# Altium PCB RF315Mhz.PcbDoc (part 2 of 5)
Units mil, origin at the board's own origin, x right, y up, seen from the top; angles counter-clockwise.
Board outline 4094.49 x 3779.53 mil, 2 copper layers (Top Layer, Bottom Layer); 180 components, 20 nets, 660 pads, 48 vias.
Unrouted connection lines stored in the file: 100.
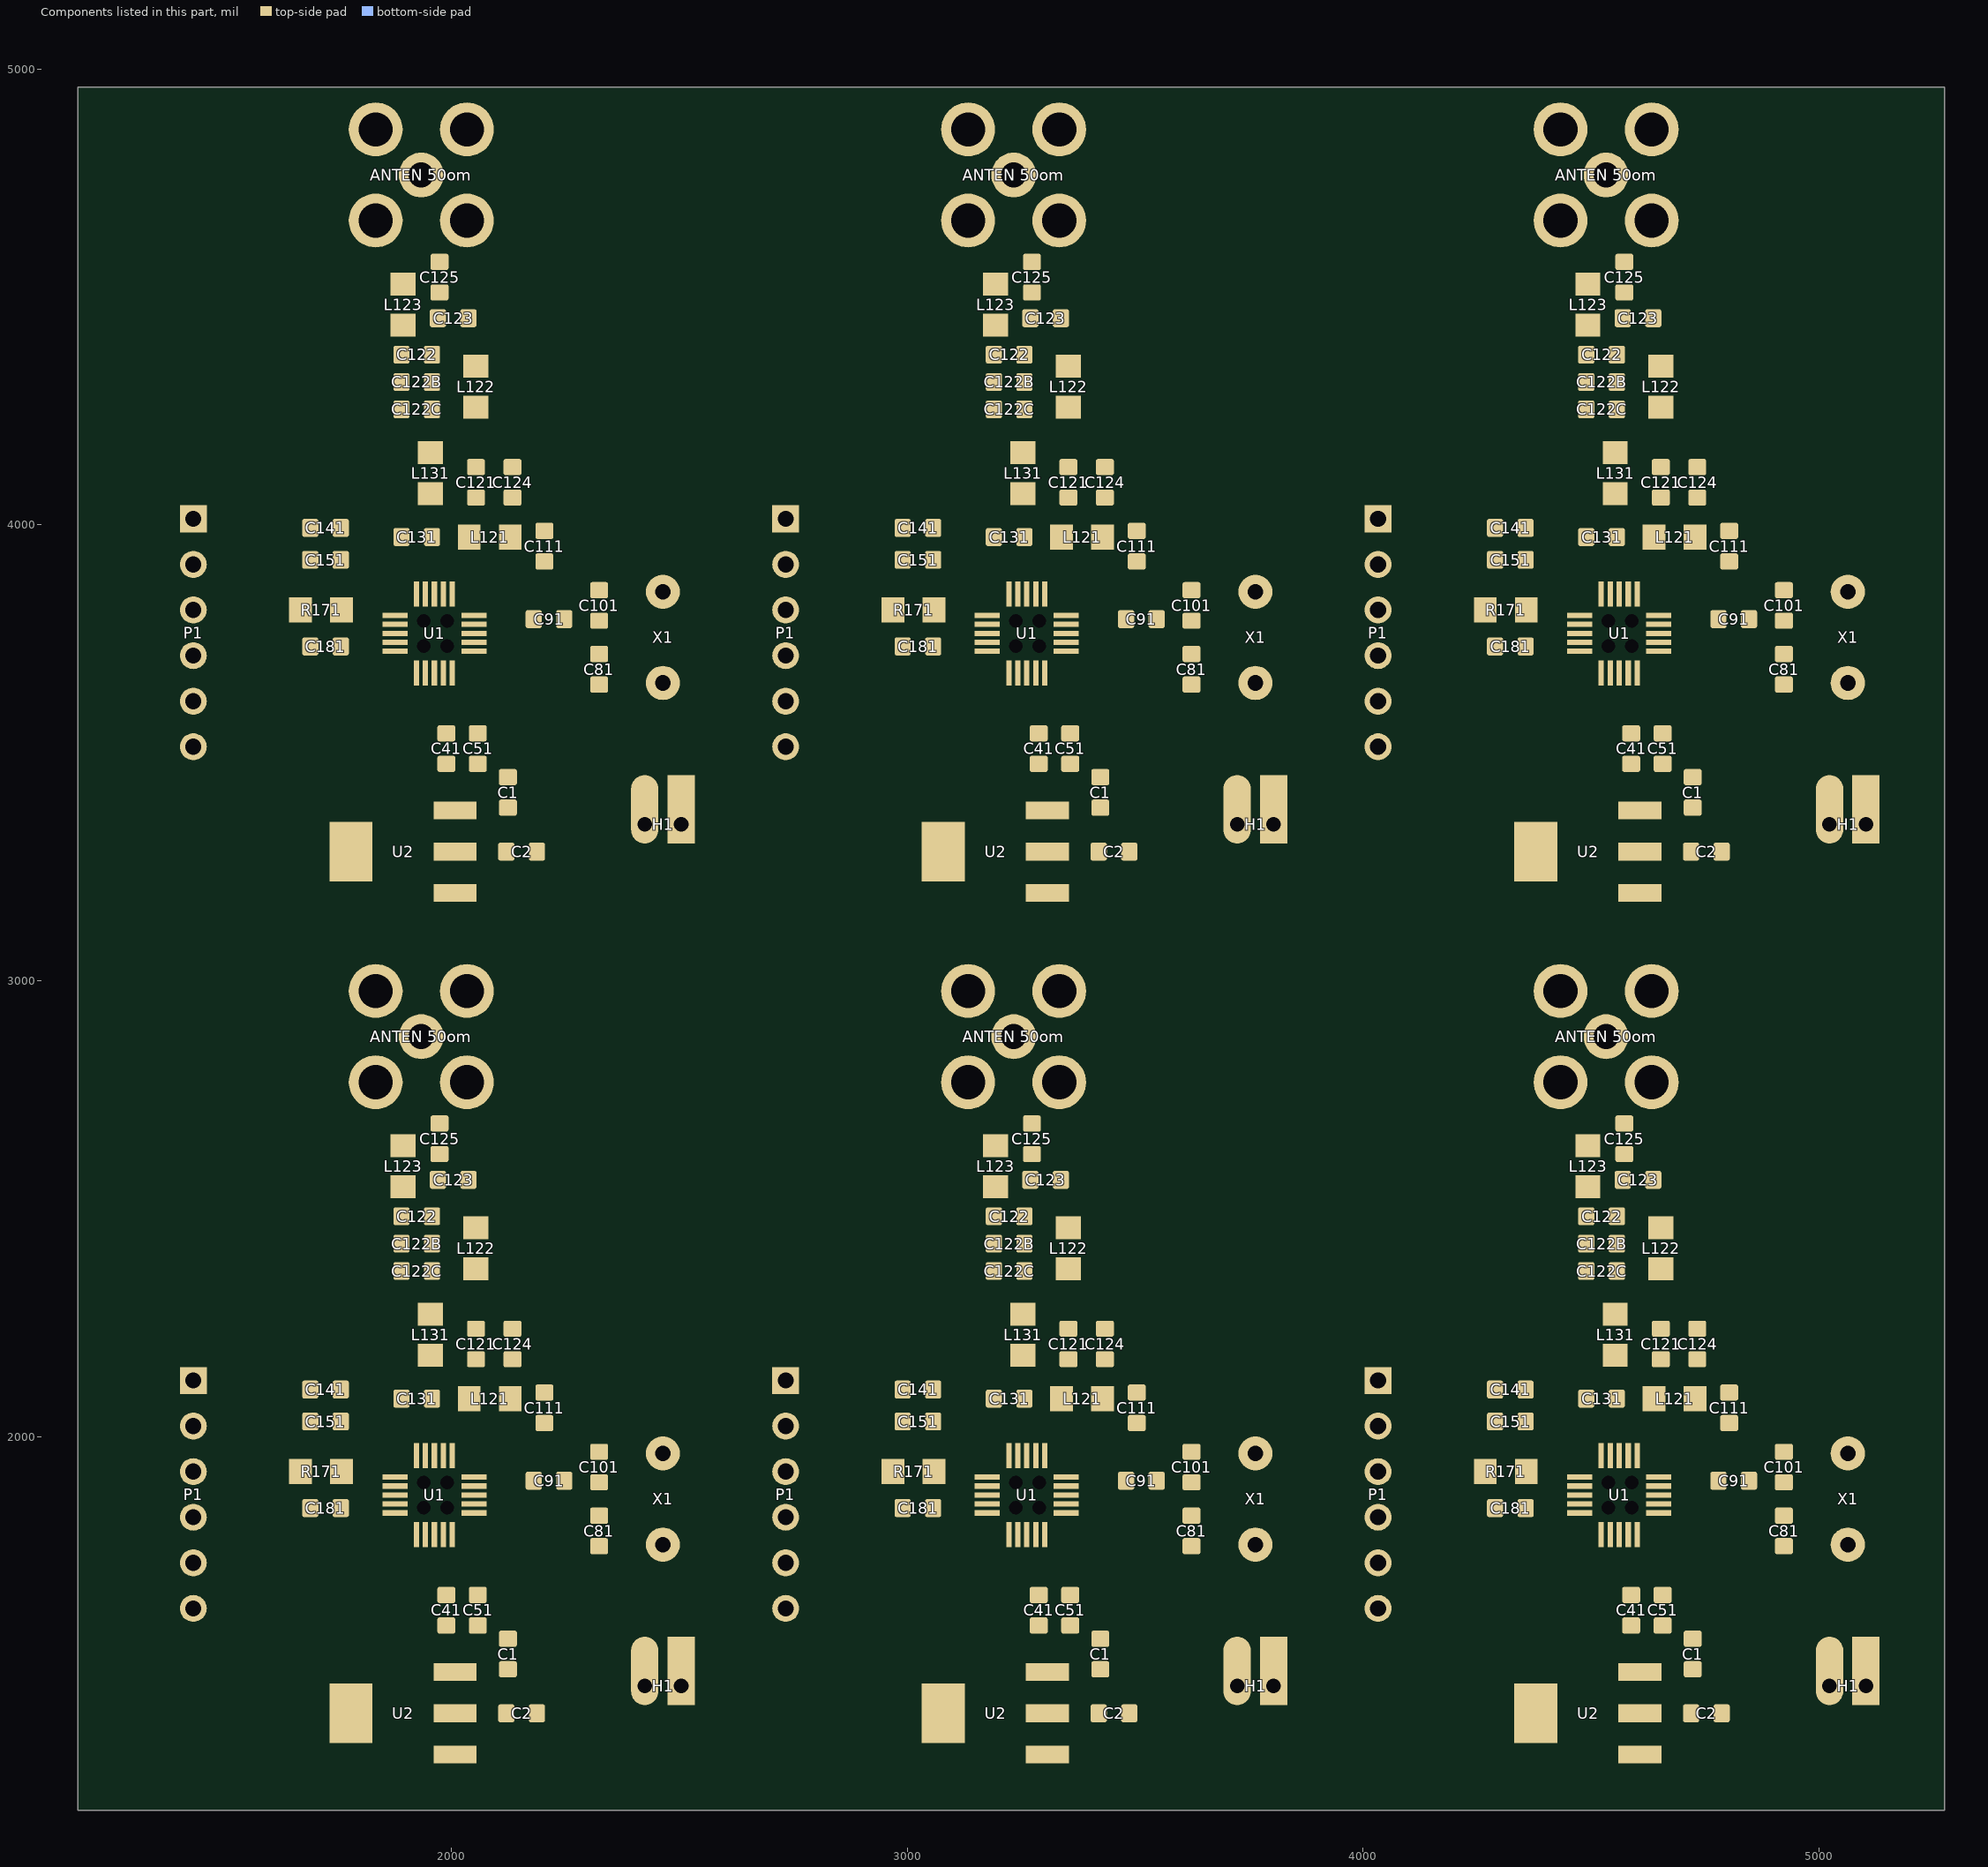
[diagram p2: the components of this part, seen from the top]

## Via types
v1: diameter 50, hole 28, Top Layer to Bottom Layer, 48 vias

## Nets (pads, with @x,y where several pads share a name; then routed paths per layer and width w, separated by ;. In a path a pad name is that pad's centre, name@x,y a point inside that pad or via, vN(x,y) a via of type N, cw(c..) or ccw(c..) an arc to the next point about the centre after c; other vN are vias at no path point) (continued)
copper on no net: (continued)
  Top Layer w1: 2319.57,2807.78 2322.57,2807.78 ; 2319.57,2808.78 2322.57,2808.78 ; 2319.57,2809.78 2322.57,2809.78 ; 2319.57,2810.78 2322.57,2810.78 ; 2319.57,2811.78 2322.57,2811.78 ; 2319.57,2812.78 2322.57,2812.78 ; 2319.57,2813.78 2322.57,2813.78 ; 2319.57,2814.78 2322.57,2814.78 ; 2319.57,2815.78 2322.57,2815.78 ; 2319.57,2816.78 2322.57,2816.78 ; 2319.57,2817.78 2322.57,2817.78 ; 2319.57,2818.78 2322.57,2818.78 ; 2319.57,2819.78 2322.57,2819.78 ; 2319.57,2820.78 2322.57,2820.78 ; 2319.57,2821.78 2322.57,2821.78 ; 2319.57,2822.78 2322.57,2822.78 ; 2319.57,2823.78 2322.57,2823.78 ; 2319.57,2824.78 2322.57,2824.78 ; 2319.57,2825.78 2322.57,2825.78 ; 2319.57,2826.78 2322.57,2826.78 ; 2319.57,2827.78 2322.57,2827.78 ; 2319.57,2828.78 2322.57,2828.78 ; 2319.57,2829.78 2322.57,2829.78 ; 2319.57,2830.78 2322.57,2830.78 ; 2319.57,2831.78 2322.57,2831.78 ; 2319.57,2832.78 2322.57,2832.78 ; 2319.57,2833.78 2322.57,2833.78 ; 2319.57,2834.78 2322.57,2834.78 ; 2319.57,2835.78 2322.57,2835.78 ; 2319.57,2836.78 2322.57,2836.78 ; 2319.57,2837.78 2322.57,2837.78 ; 2319.57,2838.78 2322.57,2838.78 ; 2319.57,2839.78 2322.57,2839.78 ; 2319.57,2840.78 2322.57,2840.78 ; 2319.57,2841.78 2322.57,2841.78 ; 2319.57,2842.78 2322.57,2842.78 ; 2319.57,2843.78 2322.57,2843.78 ; 2319.57,2844.78 2322.57,2844.78 ; 2319.57,2845.78 2322.57,2845.78 ; 2319.57,2846.78 2322.57,2846.78 ; 2319.57,2847.78 2322.57,2847.78 ; 2319.57,2848.78 2322.57,2848.78 ; 2319.57,2849.78 2322.57,2849.78 ; 2319.57,2850.78 2322.57,2850.78 ; 2319.57,2851.78 2322.57,2851.78 ; 2319.57,2852.78 2322.57,2852.78 ; 2319.57,2853.78 2322.57,2853.78 ; 2319.57,2854.78 2322.57,2854.78 ; 2319.57,2855.78 2322.57,2855.78 ; 2319.57,2856.78 2322.57,2856.78 ; 2319.57,2857.78 2322.57,2857.78 ; 2319.57,2858.78 2322.57,2858.78 ; 2319.57,2859.78 2322.57,2859.78 ; 2319.57,2860.78 2322.57,2860.78 ; 2319.57,2861.78 2322.57,2861.78 ; 2319.57,2862.78 2322.57,2862.78 ; 2319.57,2863.78 2322.57,2863.78 ; 2319.57,2864.78 2322.57,2864.78 ; 2319.57,2865.78 2322.57,2865.78 ; 2319.57,2866.78 2322.57,2866.78 ; 2319.57,2867.78 2322.57,2867.78 ; 2319.57,2868.78 2322.57,2868.78 ; 2319.57,2869.78 2322.57,2869.78 ; 2319.57,2870.78 2322.57,2870.78 ; 2319.57,2871.78 2322.57,2871.78 ; 2319.57,2872.78 2322.57,2872.78 ; 2319.57,2873.78 2322.57,2873.78 ; 2319.57,2874.78 2322.57,2874.78 ; 2319.57,2875.78 2322.57,2875.78 ; 2319.57,2876.78 2322.57,2876.78 ; 2319.57,2877.78 2322.57,2877.78 ; 2319.57,2878.78 2322.57,2878.78 ; 2319.57,2879.78 2322.57,2879.78 ; 2319.57,2880.78 2322.57,2880.78 ; 2319.57,2881.78 2322.57,2881.78 ; 2319.57,2882.78 2322.57,2882.78 ; 2319.57,2883.78 2322.57,2883.78 ; 2319.57,2884.78 2322.57,2884.78 ; 2319.57,2885.78 2322.57,2885.78 ; 2319.57,2886.78 2322.57,2886.78 ; 2319.57,2887.78 2322.57,2887.78 ; 2319.57,2888.78 2322.57,2888.78 ; 2319.57,2889.78 2322.57,2889.78 ; 2319.57,2890.78 2322.57,2890.78 ; 2319.57,2891.78 2322.57,2891.78 ; 2319.57,2892.78 2322.57,2892.78 ; 2319.57,2893.78 2322.57,2893.78 ; 2319.57,2894.78 2322.57,2894.78 ; 2319.57,2895.78 2322.57,2895.78 ; 2319.57,2896.78 2322.57,2896.78 ; 2319.57,2897.78 2322.57,2897.78 ; 2319.57,2898.78 2322.57,2898.78 ; 2319.57,2899.78 2322.57,2899.78 ; 2319.57,2900.78 2322.57,2900.78 ; 2319.57,2901.78 2322.57,2901.78 ; 2319.57,2902.78 2322.57,2902.78 ; 2319.57,2903.78 2322.57,2903.78 ; 2319.57,2904.78 2322.57,2904.78 ; 2319.57,2905.78 2322.57,2905.78 ; 2319.57,2906.78 2322.57,2906.78 ; 2319.57,2907.78 2322.57,2907.78 ; 2319.57,2908.78 2322.57,2908.78 ; 2319.57,2909.78 2322.57,2909.78 ; 2319.57,2910.78 2322.57,2910.78 ; 2319.57,2911.78 2322.57,2911.78 ; 2319.57,2912.78 2322.57,2912.78 ; 2319.57,2913.78 2322.57,2913.78 ; 2319.57,2914.78 2322.57,2914.78 ; 2319.57,2915.78 2322.57,2915.78 ; 2319.57,2916.78 2322.57,2916.78 ; 2319.57,2917.78 2322.57,2917.78 ; 2319.57,2918.78 2322.57,2918.78 ; 2319.57,2919.78 2322.57,2919.78 ; 2319.57,2920.78 2322.57,2920.78 ; 2319.57,2921.78 2322.57,2921.78 ; 2319.57,2922.78 2322.57,2922.78 ; 2319.57,2923.78 2322.57,2923.78 ; 2319.57,2924.78 2322.57,2924.78 ; 2319.57,2925.78 2322.57,2925.78 ; 2319.57,2926.78 2322.57,2926.78 ; 2319.57,2927.78 2322.57,2927.78 ; 2319.57,2928.78 2322.57,2928.78 ; 2319.57,2929.78 2322.57,2929.78 ; 2319.57,2930.78 2322.57,2930.78 ; 2319.57,2931.78 2322.57,2931.78 ; 2319.57,2932.78 2322.57,2932.78 ; 2319.57,2933.78 2322.57,2933.78 ; 2319.57,2934.78 2322.57,2934.78 ; 2319.57,2935.78 2322.57,2935.78 ; 2319.57,2936.78 2322.57,2936.78 ; 2319.57,2937.78 2322.57,2937.78 ; 2319.57,2938.78 2322.57,2938.78 ; 2319.57,2939.78 2322.57,2939.78 ; 2319.57,2940.78 2322.57,2940.78 ; 2319.57,2941.78 2322.57,2941.78 ; 2319.57,2942.78 2322.57,2942.78 ; 2319.57,2943.78 2322.57,2943.78 ; 2319.57,2944.78 2322.57,2944.78 ; 2319.57,2945.78 2322.57,2945.78 ; 2319.57,2946.78 2322.57,2946.78 ; 2319.57,2947.78 2322.57,2947.78 ; 2319.57,2948.78 2322.57,2948.78 ; 2319.57,2949.78 2322.57,2949.78 ; 2319.57,2950.78 2322.57,2950.78 ; 2319.57,2951.78 2322.57,2951.78 ; 2319.57,2952.78 2322.57,2952.78 ; 2319.57,2953.78 2323.57,2953.78 ; 2319.57,4697.54 2322.57,4697.54 ; 2319.57,4698.54 2322.57,4698.54 ; 2319.57,4699.54 2322.57,4699.54 ; 2319.57,4700.54 2322.57,4700.54 ; 2319.57,4701.54 2322.57,4701.54 ; 2319.57,4702.54 2322.57,4702.54 ; 2319.57,4703.54 2322.57,4703.54 ; 2319.57,4704.54 2322.57,4704.54 ; 2319.57,4705.54 2322.57,4705.54 ; 2319.57,4706.54 2322.57,4706.54 ; 2319.57,4707.54 2322.57,4707.54 ; 2319.57,4708.54 2322.57,4708.54 ; 2319.57,4709.54 2322.57,4709.54 ; 2319.57,4710.54 2322.57,4710.54 ; 2319.57,4711.54 2322.57,4711.54 ; 2319.57,4712.54 2322.57,4712.54 ; 2319.57,4713.54 2322.57,4713.54 ; 2319.57,4714.54 2322.57,4714.54 ; 2319.57,4715.54 2322.57,4715.54 ; 2319.57,4716.54 2322.57,4716.54 ; 2319.57,4717.54 2322.57,4717.54 ; 2319.57,4718.54 2322.57,4718.54 ; 2319.57,4719.54 2322.57,4719.54 ; 2319.57,4720.54 2322.57,4720.54 ; 2319.57,4721.54 2322.57,4721.54 ; 2319.57,4722.54 2322.57,4722.54 ; 2319.57,4723.54 2322.57,4723.54 ; 2319.57,4724.54 2322.57,4724.54 ; 2319.57,4725.54 2322.57,4725.54 ; 2319.57,4726.54 2322.57,4726.54 ; 2319.57,4727.54 2322.57,4727.54 ; 2319.57,4728.54 2322.57,4728.54 ; 2319.57,4729.54 2322.57,4729.54 ; 2319.57,4730.54 2322.57,4730.54 ; 2319.57,4731.54 2322.57,4731.54 ; 2319.57,4732.54 2322.57,4732.54 ; 2319.57,4733.54 2322.57,4733.54 ; 2319.57,4734.54 2322.57,4734.54 ; 2319.57,4735.54 2322.57,4735.54 ; 2319.57,4736.54 2322.57,4736.54 ; 2319.57,4737.54 2322.57,4737.54 ; 2319.57,4738.54 2322.57,4738.54 ; 2319.57,4739.54 2322.57,4739.54 ; 2319.57,4740.54 2322.57,4740.54 ; 2319.57,4741.54 2322.57,4741.54 ; 2319.57,4742.54 2322.57,4742.54 ; 2319.57,4743.54 2322.57,4743.54 ; 2319.57,4744.54 2322.57,4744.54 ; 2319.57,4745.54 2322.57,4745.54 ; 2319.57,4746.54 2322.57,4746.54 ; 2319.57,4747.54 2322.57,4747.54 ; 2319.57,4748.54 2322.57,4748.54 ; 2319.57,4749.54 2322.57,4749.54 ; 2319.57,4750.54 2322.57,4750.54 ; 2319.57,4751.54 2322.57,4751.54 ; 2319.57,4752.54 2322.57,4752.54 ; 2319.57,4753.54 2322.57,4753.54 ; 2319.57,4754.54 2322.57,4754.54 ; 2319.57,4755.54 2322.57,4755.54 ; 2319.57,4756.54 2322.57,4756.54 ; 2319.57,4757.54 2322.57,4757.54 ; 2319.57,4758.54 2322.57,4758.54 ; 2319.57,4759.54 2322.57,4759.54 ; 2319.57,4760.54 2322.57,4760.54 ; 2319.57,4761.54 2322.57,4761.54 ; 2319.57,4762.54 2322.57,4762.54 ; 2319.57,4763.54 2322.57,4763.54 ; 2319.57,4764.54 2322.57,4764.54 ; 2319.57,4765.54 2322.57,4765.54 ; 2319.57,4766.54 2322.57,4766.54 ; 2319.57,4767.54 2322.57,4767.54 ; 2319.57,4768.54 2322.57,4768.54 ; 2319.57,4769.54 2322.57,4769.54 ; 2319.57,4770.54 2322.57,4770.54 ; 2319.57,4771.54 2322.57,4771.54 ; 2319.57,4772.54 2322.57,4772.54 ; 2319.57,4773.54 2322.57,4773.54 ; 2319.57,4774.54 2322.57,4774.54 ; 2319.57,4775.54 2322.57,4775.54 ; 2319.57,4776.54 2322.57,4776.54 ; 2319.57,4777.54 2322.57,4777.54 ; 2319.57,4778.54 2322.57,4778.54 ; 2319.57,4779.54 2322.57,4779.54 ; 2319.57,4780.54 2322.57,4780.54 ; 2319.57,4781.54 2322.57,4781.54 ; 2319.57,4782.54 2322.57,4782.54 ; 2319.57,4783.54 2322.57,4783.54 ; 2319.57,4784.54 2322.57,4784.54 ; 2319.57,4785.54 2322.57,4785.54 ; 2319.57,4786.54 2322.57,4786.54 ; 2319.57,4787.54 2322.57,4787.54 ; 2319.57,4788.54 2322.57,4788.54 ; 2319.57,4789.54 2322.57,4789.54 ; 2319.57,4790.54 2322.57,4790.54 ; 2319.57,4791.54 2322.57,4791.54 ; 2319.57,4792.54 2322.57,4792.54 ; 2319.57,4793.54 2322.57,4793.54 ; 2319.57,4794.54 2322.57,4794.54 ; 2319.57,4795.54 2322.57,4795.54 ; 2319.57,4796.54 2322.57,4796.54 ; 2319.57,4797.54 2322.57,4797.54 ; 2319.57,4798.54 2322.57,4798.54 ; 2319.57,4799.54 2322.57,4799.54 ; 2319.57,4800.54 2322.57,4800.54 ; 2319.57,4801.54 2322.57,4801.54 ; 2319.57,4802.54 2322.57,4802.54 ; 2319.57,4803.54 2322.57,4803.54 ; 2319.57,4804.54 2322.57,4804.54 ; 2319.57,4805.54 2322.57,4805.54 ; 2319.57,4806.54 2322.57,4806.54 ; 2319.57,4807.54 2322.57,4807.54 ; 2319.57,4808.54 2322.57,4808.54 ; 2319.57,4809.54 2322.57,4809.54 ; 2319.57,4810.54 2322.57,4810.54 ; 2319.57,4811.54 2322.57,4811.54 ; 2319.57,4812.54 2322.57,4812.54 ; 2319.57,4813.54 2322.57,4813.54 ; 2319.57,4814.54 2322.57,4814.54 ; 2319.57,4815.54 2322.57,4815.54 ; 2319.57,4816.54 2322.57,4816.54 ; 2319.57,4817.54 2322.57,4817.54 ; 2319.57,4818.54 2322.57,4818.54 ; 2319.57,4819.54 2322.57,4819.54 ; 2319.57,4820.54 2322.57,4820.54 ; 2319.57,4821.54 2322.57,4821.54 ; 2319.57,4822.54 2322.57,4822.54 ; 2319.57,4823.54 2322.57,4823.54 ; 2319.57,4824.54 2322.57,4824.54 ; 2319.57,4825.54 2322.57,4825.54 ; 2319.57,4826.54 2322.57,4826.54 ; 2319.57,4827.54 2322.57,4827.54 ; 2319.57,4828.54 2322.57,4828.54 ; 2319.57,4829.54 2322.57,4829.54 ; 2319.57,4830.54 2322.57,4830.54 ; 2319.57,4831.54 2322.57,4831.54 ; 2319.57,4832.54 2322.57,4832.54 ; 2319.57,4833.54 2322.57,4833.54 ; 2319.57,4834.54 2322.57,4834.54 ; 2319.57,4835.54 2322.57,4835.54 ; 2319.57,4836.54 2322.57,4836.54 ; 2319.57,4837.54 2322.57,4837.54 ; 2319.57,4838.54 2322.57,4838.54 ; 2319.57,4839.54 2322.57,4839.54 ; 2319.57,4840.54 2322.57,4840.54 ; 2319.57,4841.54 2322.57,4841.54 ; 2319.57,4842.54 2322.57,4842.54 ; 2319.57,4843.54 2323.57,4843.54 ; 2320.57,2803.78 2324.57,2803.78 ; 2320.57,2804.78 2323.57,2804.78 ; 2320.57,2805.78 2323.57,2805.78 ; 2320.57,2806.78 2323.57,2806.78 ; 2320.57,2954.78 2323.57,2954.78 ; 2320.57,2955.78 2323.57,2955.78 ; 2320.57,2956.78 2324.57,2956.78 ; 2320.57,4693.54 2324.57,4693.54 ; 2320.57,4694.54 2323.57,4694.54 ; 2320.57,4695.54 2323.57,4695.54 ; 2320.57,4696.54 2323.57,4696.54 ; 2320.57,4844.54 2323.57,4844.54 ; 2320.57,4845.54 2323.57,4845.54 ; 2320.57,4846.54 2324.57,4846.54 ; 2321.57,2801.78 2324.57,2801.78 ; 2321.57,2802.78 2324.57,2802.78 ; 2321.57,2957.78 2324.57,2957.78 ; 2321.57,2958.78 2324.57,2958.78 ; 2321.57,2959.78 2325.57,2959.78 ; 2321.57,4691.54 2324.57,4691.54 ; 2321.57,4692.54 2324.57,4692.54 ; 2321.57,4847.54 2324.57,4847.54 ; 2321.57,4848.54 2324.57,4848.54 ; 2321.57,4849.54 2325.57,4849.54 ; 2322.57,2799.78 2325.57,2799.78 ; 2322.57,2800.78 2325.57,2800.78 ; 2322.57,2960.78 2325.57,2960.78 ; 2322.57,2961.78 2326.57,2961.78 ; 2322.57,4689.54 2325.57,4689.54 ; 2322.57,4690.54 2325.57,4690.54 ; 2322.57,4850.54 2325.57,4850.54 ; 2322.57,4851.54 2326.57,4851.54 ; 2323.57,2797.78 2327.57,2797.78 ; 2323.57,2798.78 2326.57,2798.78 ; 2323.57,2962.78 2326.57,2962.78 ; 2323.57,2963.78 2327.57,2963.78 ; 2323.57,4687.54 2327.57,4687.54 ; 2323.57,4688.54 2326.57,4688.54 ; 2323.57,4852.54 2326.57,4852.54 ; 2323.57,4853.54 2327.57,4853.54 ; 2324.57,2795.78 2328.57,2795.78 ; 2324.57,2796.78 2327.57,2796.78 ; 2324.57,2964.78 2328.57,2964.78 ; 2324.57,4685.54 2328.57,4685.54 ; 2324.57,4686.54 2327.57,4686.54 ; 2324.57,4854.54 2328.57,4854.54 ; 2325.57,2794.78 2329.57,2794.78 ; 2325.57,2965.78 2329.57,2965.78 ; 2325.57,2966.78 2329.57,2966.78 ; 2325.57,4684.54 2329.57,4684.54 ; 2325.57,4855.54 2329.57,4855.54 ; 2325.57,4856.54 2329.57,4856.54 ; 2326.57,2792.78 2330.57,2792.78 ; 2326.57,2793.78 2330.57,2793.78 ; 2326.57,2967.78 2330.57,2967.78 ; 2326.57,4682.54 2330.57,4682.54 ; 2326.57,4683.54 2330.57,4683.54 ; 2326.57,4857.54 2330.57,4857.54 ; 2327.57,2791.78 2331.57,2791.78 ; 2327.57,2968.78 2331.57,2968.78 ; 2327.57,4681.54 2331.57,4681.54 ; 2327.57,4858.54 2331.57,4858.54 ; 2328.57,2790.78 2333.57,2790.78 ; 2328.57,2969.78 2332.57,2969.78 ; 2328.57,4680.54 2333.57,4680.54 ; 2328.57,4859.54 2332.57,4859.54 ; 2329.57,2789.78 2334.57,2789.78 ; 2329.57,2970.78 2334.57,2970.78 ; 2329.57,4679.54 2334.57,4679.54 ; 2329.57,4860.54 2334.57,4860.54 ; 2330.57,2788.78 2335.57,2788.78 ; 2330.57,2971.78 2335.57,2971.78 ; 2330.57,4678.54 2335.57,4678.54 ; 2330.57,4861.54 2335.57,4861.54 ; 2331.57,2972.78 2336.57,2972.78 ; 2331.57,4862.54 2336.57,4862.54 ; 2332.57,2787.78 2337.57,2787.78 ; 2332.57,2973.78 2338.57,2973.78 ; 2332.57,4677.54 2337.57,4677.54 ; 2332.57,4863.54 2338.57,4863.54 ; 2333.57,2786.78 2338.57,2786.78 ; 2333.57,4676.54 2338.57,4676.54 ; 2334.57,2785.78 2341.57,2785.78 ; 2334.57,2974.78 2340.57,2974.78 ; 2334.57,4675.54 2341.57,4675.54 ; 2334.57,4864.54 2340.57,4864.54 ; 2335.57,2975.78 2343.57,2975.78 ; 2335.57,4865.54 2343.57,4865.54 ; 2336.57,2784.78 2343.57,2784.78 ; 2336.57,2950.78 2358.57,2950.78 ; 2336.57,2951.78 2357.57,2951.78 ; 2336.57,2952.78 2356.57,2952.78 ; 2336.57,2953.78 2356.57,2953.78 ; 2336.57,2954.78 2356.57,2954.78 ; 2336.57,2955.78 2356.57,2955.78 ; 2336.57,2956.78 2355.57,2956.78 ; 2336.57,4674.54 2343.57,4674.54 ; 2336.57,4840.54 2358.57,4840.54 ; 2336.57,4841.54 2357.57,4841.54 ; 2336.57,4842.54 2356.57,4842.54 ; 2336.57,4843.54 2356.57,4843.54 ; 2336.57,4844.54 2356.57,4844.54 ; 2336.57,4845.54 2356.57,4845.54 ; 2336.57,4846.54 2355.57,4846.54 ; 2337.57,2948.78 2360.57,2948.78 ; 2337.57,2949.78 2359.57,2949.78 ; 2337.57,2957.78 2355.57,2957.78 ; 2337.57,2958.78 2354.57,2958.78 ; 2337.57,2976.78 2346.57,2976.78 ; 2337.57,4838.54 2360.57,4838.54 ; 2337.57,4839.54 2359.57,4839.54 ; 2337.57,4847.54 2355.57,4847.54 ; 2337.57,4848.54 2354.57,4848.54 ; 2337.57,4866.54 2346.57,4866.54 ; 2338.57,2783.78 2347.57,2783.78 ; 2338.57,2946.78 2362.57,2946.78 ; 2338.57,2947.78 2361.57,2947.78 ; 2338.57,2959.78 2354.57,2959.78 ; 2338.57,4673.54 2347.57,4673.54 ; 2338.57,4836.54 2362.57,4836.54 ; 2338.57,4837.54 2361.57,4837.54 ; 2338.57,4849.54 2354.57,4849.54 ; 2339.57,2800.78 2342.57,2800.78 ; 2339.57,2801.78 2348.57,2801.78 ; 2339.57,2802.78 2354.57,2802.78 ; 2339.57,2803.78 2360.57,2803.78 ; 2339.57,2804.78 2361.57,2804.78 ; 2339.57,2945.78 2363.57,2945.78 ; 2339.57,2960.78 2353.57,2960.78 ; 2339.57,2977.78 2498.57,2977.78 ; 2339.57,4690.54 2342.57,4690.54 ; 2339.57,4691.54 2348.57,4691.54 ; 2339.57,4692.54 2354.57,4692.54 ; 2339.57,4693.54 2360.57,4693.54 ; 2339.57,4694.54 2361.57,4694.54 ; 2339.57,4835.54 2363.57,4835.54 ; 2339.57,4850.54 2353.57,4850.54 ; 2339.57,4867.54 2498.57,4867.54 ; 2340.57,2782.78 2498.57,2782.78 ; 2340.57,2805.78 2362.57,2805.78 ; 2340.57,2806.78 2363.57,2806.78 ; 2340.57,2807.78 2364.57,2807.78 ; 2340.57,2808.78 2365.57,2808.78 ; 2340.57,2809.78 2366.57,2809.78 ; 2340.57,2810.78 2367.57,2810.78 ; 2340.57,2961.78 2351.57,2961.78 ; 2340.57,4672.54 2498.57,4672.54 ; 2340.57,4695.54 2362.57,4695.54 ; 2340.57,4696.54 2363.57,4696.54 ; 2340.57,4697.54 2364.57,4697.54 ; 2340.57,4698.54 2365.57,4698.54 ; 2340.57,4699.54 2366.57,4699.54 ; 2340.57,4700.54 2367.57,4700.54 ; 2340.57,4851.54 2351.57,4851.54 ; 2341.57,2811.78 2368.57,2811.78 ; 2341.57,2812.78 2369.57,2812.78 ; 2341.57,2813.78 2370.57,2813.78 ; 2341.57,2814.78 2371.57,2814.78 ; 2341.57,2815.78 2372.57,2815.78 ; 2341.57,2816.78 2373.57,2816.78 ; 2341.57,2944.78 2364.57,2944.78 ; 2341.57,4701.54 2368.57,4701.54 ; 2341.57,4702.54 2369.57,4702.54 ; 2341.57,4703.54 2370.57,4703.54 ; 2341.57,4704.54 2371.57,4704.54 ; 2341.57,4705.54 2372.57,4705.54 ; 2341.57,4706.54 2373.57,4706.54 ; 2341.57,4834.54 2364.57,4834.54 ; 2342.57,2817.78 2374.57,2817.78 ; 2342.57,2818.78 2375.57,2818.78 ; 2342.57,2819.78 2376.57,2819.78 ; 2342.57,2820.78 2377.57,2820.78 ; 2342.57,2962.78 2349.57,2962.78 ; 2342.57,2978.78 2496.57,2978.78 ; 2342.57,4707.54 2374.57,4707.54 ; 2342.57,4708.54 2375.57,4708.54 ; 2342.57,4709.54 2376.57,4709.54 ; 2342.57,4710.54 2377.57,4710.54 ; 2342.57,4852.54 2349.57,4852.54 ; 2342.57,4868.54 2496.57,4868.54 ; 2343.57,2781.78 2495.57,2781.78 ; 2343.57,2821.78 2378.57,2821.78 ; 2343.57,2943.78 2365.57,2943.78 ; 2343.57,4671.54 2495.57,4671.54 ; 2343.57,4711.54 2378.57,4711.54 ; 2343.57,4833.54 2365.57,4833.54 ; 2344.57,2822.78 2379.57,2822.78 ; 2344.57,4712.54 2379.57,4712.54 ; 2345.57,2823.78 2380.57,2823.78 ; 2345.57,2979.78 2492.57,2979.78 ; 2345.57,4713.54 2380.57,4713.54 ; 2345.57,4869.54 2492.57,4869.54 ; 2346.57,2780.78 2491.57,2780.78 ; 2346.57,2824.78 2381.57,2824.78 ; 2346.57,2894.78 2348.57,2894.78 ; 2346.57,4670.54 2491.57,4670.54 ; 2346.57,4714.54 2381.57,4714.54 ; 2346.57,4784.54 2348.57,4784.54 ; 2347.57,2825.78 2382.57,2825.78 ; 2347.57,2895.78 2351.57,2895.78 ; 2347.57,2942.78 2366.57,2942.78 ; 2347.57,4715.54 2382.57,4715.54 ; 2347.57,4785.54 2351.57,4785.54 ; 2347.57,4832.54 2366.57,4832.54 ; 2348.57,2826.78 2383.57,2826.78 ; 2348.57,2896.78 2354.57,2896.78 ; 2348.57,2941.78 2367.57,2941.78 ; 2348.57,4716.54 2383.57,4716.54 ; 2348.57,4786.54 2354.57,4786.54 ; 2348.57,4831.54 2367.57,4831.54 ; 2349.57,2827.78 2384.57,2827.78 ; 2349.57,2897.78 2357.57,2897.78 ; 2349.57,2940.78 2368.57,2940.78 ; 2349.57,4717.54 2384.57,4717.54 ; 2349.57,4787.54 2357.57,4787.54 ; 2349.57,4830.54 2368.57,4830.54 ; 2350.57,2828.78 2385.57,2828.78 ; 2350.57,2898.78 2360.57,2898.78 ; 2350.57,2939.78 2369.57,2939.78 ; 2350.57,4718.54 2385.57,4718.54 ; 2350.57,4788.54 2360.57,4788.54 ; 2350.57,4829.54 2369.57,4829.54 ; 2351.57,2829.78 2386.57,2829.78 ; 2351.57,2899.78 2362.57,2899.78 ; 2351.57,2938.78 2370.57,2938.78 ; 2351.57,4719.54 2386.57,4719.54 ; 2351.57,4789.54 2362.57,4789.54 ; 2351.57,4828.54 2370.57,4828.54 ; 2352.57,2830.78 2387.57,2830.78 ; 2352.57,2900.78 2365.57,2900.78 ; 2352.57,2937.78 2371.57,2937.78 ; 2352.57,4720.54 2387.57,4720.54 ; 2352.57,4790.54 2365.57,4790.54 ; 2352.57,4827.54 2371.57,4827.54 ; 2353.57,2831.78 2388.57,2831.78 ; 2353.57,2901.78 2368.57,2901.78 ; 2353.57,2936.78 2372.57,2936.78 ; 2353.57,4721.54 2388.57,4721.54 ; 2353.57,4791.54 2368.57,4791.54 ; 2353.57,4826.54 2372.57,4826.54 ; 2354.57,2832.78 2389.57,2832.78 ; 2354.57,2902.78 2369.57,2902.78 ; 2354.57,2935.78 2373.57,2935.78 ; 2354.57,4722.54 2389.57,4722.54 ; 2354.57,4792.54 2369.57,4792.54 ; 2354.57,4825.54 2373.57,4825.54 ; 2355.57,2833.78 2390.57,2833.78 ; 2355.57,2903.78 2370.57,2903.78 ; 2355.57,2934.78 2374.57,2934.78 ; 2355.57,4723.54 2390.57,4723.54 ; 2355.57,4793.54 2370.57,4793.54 ; 2355.57,4824.54 2374.57,4824.54 ; 2356.57,2834.78 2391.57,2834.78 ; 2356.57,2904.78 2371.57,2904.78 ; 2356.57,2933.78 2375.57,2933.78 ; 2356.57,4724.54 2391.57,4724.54 ; 2356.57,4794.54 2371.57,4794.54 ; 2356.57,4823.54 2375.57,4823.54 ; 2357.57,2835.78 2392.57,2835.78 ; 2357.57,2905.78 2372.57,2905.78 ; 2357.57,2932.78 2376.57,2932.78 ; 2357.57,4725.54 2392.57,4725.54 ; 2357.57,4795.54 2372.57,4795.54 ; 2357.57,4822.54 2376.57,4822.54 ; 2358.57,2836.78 2393.57,2836.78 ; 2358.57,2906.78 2373.57,2906.78 ; 2358.57,2931.78 2377.57,2931.78 ; 2358.57,4726.54 2393.57,4726.54 ; 2358.57,4796.54 2373.57,4796.54 ; 2358.57,4821.54 2377.57,4821.54 ; 2359.57,2837.78 2394.57,2837.78 ; 2359.57,2907.78 2409.57,2907.78 ; 2359.57,2930.78 2378.57,2930.78 ; 2359.57,4727.54 2394.57,4727.54 ; 2359.57,4797.54 2409.57,4797.54 ; 2359.57,4820.54 2378.57,4820.54 ; 2360.57,2838.78 2395.57,2838.78 ; 2360.57,2908.78 2408.57,2908.78 ; 2360.57,2929.78 2379.57,2929.78 ; 2360.57,4728.54 2395.57,4728.54 ; 2360.57,4798.54 2408.57,4798.54 ; 2360.57,4819.54 2379.57,4819.54 ; 2361.57,2839.78 2396.57,2839.78 ; 2361.57,2909.78 2407.57,2909.78 ; 2361.57,2928.78 2395.57,2928.78 ; 2361.57,4729.54 2396.57,4729.54 ; 2361.57,4799.54 2407.57,4799.54 ; 2361.57,4818.54 2395.57,4818.54 ; 2362.57,2840.78 2397.57,2840.78 ; 2362.57,2910.78 2406.57,2910.78 ; 2362.57,2927.78 2394.57,2927.78 ; 2362.57,4730.54 2397.57,4730.54 ; 2362.57,4800.54 2406.57,4800.54 ; 2362.57,4817.54 2394.57,4817.54 ; 2363.57,2841.78 2398.57,2841.78 ; 2363.57,2911.78 2405.57,2911.78 ; 2363.57,2926.78 2393.57,2926.78 ; 2363.57,4731.54 2398.57,4731.54 ; 2363.57,4801.54 2405.57,4801.54 ; 2363.57,4816.54 2393.57,4816.54 ; 2364.57,2842.78 2399.57,2842.78 ; 2364.57,2912.78 2404.57,2912.78 ; 2364.57,2925.78 2392.57,2925.78 ; 2364.57,4732.54 2399.57,4732.54 ; 2364.57,4802.54 2404.57,4802.54 ; 2364.57,4815.54 2392.57,4815.54 ; 2365.57,2843.78 2400.57,2843.78 ; 2365.57,2913.78 2403.57,2913.78 ; 2365.57,2924.78 2392.57,2924.78 ; 2365.57,4733.54 2400.57,4733.54 ; 2365.57,4803.54 2403.57,4803.54 ; 2365.57,4814.54 2392.57,4814.54 ; 2366.57,2844.78 2401.57,2844.78 ; 2366.57,2914.78 2402.57,2914.78 ; 2366.57,2923.78 2393.57,2923.78 ; 2366.57,4734.54 2401.57,4734.54 ; 2366.57,4804.54 2402.57,4804.54 ; 2366.57,4813.54 2393.57,4813.54 ; 2367.57,2845.78 2402.57,2845.78 ; 2367.57,2915.78 2401.57,2915.78 ; 2367.57,2922.78 2394.57,2922.78 ; 2367.57,4735.54 2402.57,4735.54 ; 2367.57,4805.54 2401.57,4805.54 ; 2367.57,4812.54 2394.57,4812.54 ; 2368.57,2846.78 2403.57,2846.78 ; 2368.57,2916.78 2400.57,2916.78 ; 2368.57,2921.78 2395.57,2921.78 ; 2368.57,4736.54 2403.57,4736.54 ; 2368.57,4806.54 2400.57,4806.54 ; 2368.57,4811.54 2395.57,4811.54 ; 2369.57,2847.78 2404.57,2847.78 ; 2369.57,2917.78 2399.57,2917.78 ; 2369.57,2920.78 2396.57,2920.78 ; 2369.57,4737.54 2404.57,4737.54 ; 2369.57,4807.54 2399.57,4807.54 ; 2369.57,4810.54 2396.57,4810.54 ; 2370.57,2848.78 2405.57,2848.78 ; 2370.57,2918.78 2398.57,2918.78 ; 2370.57,2919.78 2397.57,2919.78 ; 2370.57,4738.54 2405.57,4738.54 ; 2370.57,4808.54 2398.57,4808.54 ; 2370.57,4809.54 2397.57,4809.54 ; 2371.57,2849.78 2406.57,2849.78 ; 2371.57,4739.54 2406.57,4739.54 ; 2372.57,2850.78 2407.57,2850.78 ; 2372.57,4740.54 2407.57,4740.54 ; 2373.57,2851.78 2408.57,2851.78 ; 2373.57,4741.54 2408.57,4741.54 ; 2374.57,2852.78 2409.57,2852.78 ; 2374.57,4742.54 2409.57,4742.54 ; 2375.57,2853.78 2410.57,2853.78 ; 2375.57,2906.78 2410.57,2906.78 ; 2375.57,4743.54 2410.57,4743.54 ; 2375.57,4796.54 2410.57,4796.54 ; 2376.57,2854.78 2411.57,2854.78 ; 2376.57,2905.78 2411.57,2905.78 ; 2376.57,4744.54 2411.57,4744.54 ; 2376.57,4795.54 2411.57,4795.54 ; 2377.57,2855.78 2412.57,2855.78 ; 2377.57,2904.78 2412.57,2904.78 ; 2377.57,4745.54 2412.57,4745.54 ; 2377.57,4794.54 2412.57,4794.54 ; 2378.57,2856.78 2413.57,2856.78 ; 2378.57,2903.78 2413.57,2903.78 ; 2378.57,4746.54 2413.57,4746.54 ; 2378.57,4793.54 2413.57,4793.54 ; 2379.57,2857.78 2414.57,2857.78 ; 2379.57,2902.78 2414.57,2902.78 ; 2379.57,4747.54 2414.57,4747.54 ; 2379.57,4792.54 2414.57,4792.54 ; 2380.57,2858.78 2415.57,2858.78 ; 2380.57,2901.78 2415.57,2901.78 ; 2380.57,4748.54 2415.57,4748.54 ; 2380.57,4791.54 2415.57,4791.54 ; 2381.57,2859.78 2416.57,2859.78 ; 2381.57,2900.78 2416.57,2900.78 ; 2381.57,2929.78 2396.57,2929.78 ; 2381.57,4749.54 2416.57,4749.54 ; 2381.57,4790.54 2416.57,4790.54 ; 2381.57,4819.54 2396.57,4819.54 ; 2382.57,2860.78 2417.57,2860.78 ; 2382.57,2899.78 2417.57,2899.78 ; 2382.57,2930.78 2397.57,2930.78 ; 2382.57,4750.54 2417.57,4750.54 ; 2382.57,4789.54 2417.57,4789.54 ; 2382.57,4820.54 2397.57,4820.54 ; 2383.57,2861.78 2418.57,2861.78 ; 2383.57,2898.78 2418.57,2898.78 ; 2383.57,2931.78 2398.57,2931.78 ; 2383.57,4751.54 2418.57,4751.54 ; 2383.57,4788.54 2418.57,4788.54 ; 2383.57,4821.54 2398.57,4821.54 ; 2384.57,2862.78 2454.57,2862.78 ; 2384.57,2897.78 2454.57,2897.78 ; 2384.57,2932.78 2398.57,2932.78 ; 2384.57,4752.54 2454.57,4752.54 ; 2384.57,4787.54 2454.57,4787.54 ; 2384.57,4822.54 2398.57,4822.54 ; 2385.57,2863.78 2453.57,2863.78 ; 2385.57,2896.78 2453.57,2896.78 ; 2385.57,2933.78 2398.57,2933.78 ; 2385.57,4753.54 2453.57,4753.54 ; 2385.57,4786.54 2453.57,4786.54 ; 2385.57,4823.54 2398.57,4823.54 ; 2386.57,2864.78 2452.57,2864.78 ; 2386.57,2895.78 2452.57,2895.78 ; 2386.57,2934.78 2399.57,2934.78 ; 2386.57,4754.54 2452.57,4754.54 ; 2386.57,4785.54 2452.57,4785.54 ; 2386.57,4824.54 2399.57,4824.54 ; 2387.57,2865.78 2451.57,2865.78 ; 2387.57,2894.78 2451.57,2894.78 ; 2387.57,2935.78 2399.57,2935.78 ; 2387.57,4755.54 2451.57,4755.54 ; 2387.57,4784.54 2451.57,4784.54 ; 2387.57,4825.54 2399.57,4825.54 ; 2388.57,2866.78 2450.57,2866.78 ; 2388.57,2893.78 2450.57,2893.78 ; 2388.57,2936.78 2399.57,2936.78 ; 2388.57,4756.54 2450.57,4756.54 ; 2388.57,4783.54 2450.57,4783.54 ; 2388.57,4826.54 2399.57,4826.54 ; 2389.57,2867.78 2449.57,2867.78 ; 2389.57,2892.78 2449.57,2892.78 ; 2389.57,2937.78 2400.57,2937.78 ; 2389.57,4757.54 2449.57,4757.54 ; 2389.57,4782.54 2449.57,4782.54 ; 2389.57,4827.54 2400.57,4827.54 ; 2390.57,2868.78 2448.57,2868.78 ; 2390.57,2891.78 2448.57,2891.78 ; 2390.57,2938.78 2400.57,2938.78 ; 2390.57,4758.54 2448.57,4758.54 ; 2390.57,4781.54 2448.57,4781.54 ; 2390.57,4828.54 2400.57,4828.54 ; 2391.57,2869.78 2447.57,2869.78 ; 2391.57,2890.78 2447.57,2890.78 ; 2391.57,2939.78 2401.57,2939.78 ; 2391.57,4759.54 2447.57,4759.54 ; 2391.57,4780.54 2447.57,4780.54 ; 2391.57,4829.54 2401.57,4829.54 ; 2392.57,2870.78 2446.57,2870.78 ; 2392.57,2889.78 2446.57,2889.78 ; 2392.57,2940.78 2401.57,2940.78 ; 2392.57,4760.54 2446.57,4760.54 ; 2392.57,4779.54 2446.57,4779.54 ; 2392.57,4830.54 2401.57,4830.54 ; 2393.57,2871.78 2445.57,2871.78 ; 2393.57,2888.78 2445.57,2888.78 ; 2393.57,2941.78 2401.57,2941.78 ; 2393.57,4761.54 2445.57,4761.54 ; 2393.57,4778.54 2445.57,4778.54 ; 2393.57,4831.54 2401.57,4831.54 ; 2394.57,2872.78 2444.57,2872.78 ; 2394.57,2887.78 2444.57,2887.78 ; 2394.57,2942.78 2402.57,2942.78 ; 2394.57,4762.54 2444.57,4762.54 ; 2394.57,4777.54 2444.57,4777.54 ; 2394.57,4832.54 2402.57,4832.54 ; 2395.57,2873.78 2443.57,2873.78 ; 2395.57,2886.78 2443.57,2886.78 ; 2395.57,2943.78 2402.57,2943.78 ; 2395.57,4763.54 2443.57,4763.54 ; 2395.57,4776.54 2443.57,4776.54 ; 2395.57,4833.54 2402.57,4833.54 ; 2396.57,2874.78 2442.57,2874.78 ; 2396.57,2885.78 2442.57,2885.78 ; 2396.57,2944.78 2402.57,2944.78 ; 2396.57,4764.54 2442.57,4764.54 ; 2396.57,4775.54 2442.57,4775.54 ; 2396.57,4834.54 2402.57,4834.54 ; 2397.57,2875.78 2441.57,2875.78 ; 2397.57,2884.78 2441.57,2884.78 ; 2397.57,2945.78 2403.57,2945.78 ; 2397.57,4765.54 2441.57,4765.54 ; 2397.57,4774.54 2441.57,4774.54 ; 2397.57,4835.54 2403.57,4835.54 ; 2398.57,2876.78 2440.57,2876.78 ; 2398.57,2883.78 2440.57,2883.78 ; 2398.57,2946.78 2403.57,2946.78 ; 2398.57,4766.54 2440.57,4766.54 ; 2398.57,4773.54 2440.57,4773.54 ; 2398.57,4836.54 2403.57,4836.54 ; 2399.57,2877.78 2439.57,2877.78 ; 2399.57,2882.78 2439.57,2882.78 ; 2399.57,2947.78 2403.57,2947.78 ; 2399.57,4767.54 2439.57,4767.54 ; 2399.57,4772.54 2439.57,4772.54 ; 2399.57,4837.54 2403.57,4837.54 ; 2400.57,2878.78 2438.57,2878.78 ; 2400.57,2881.78 2438.57,2881.78 ; 2400.57,2948.78 2404.57,2948.78 ; 2400.57,4768.54 2438.57,4768.54 ; 2400.57,4771.54 2438.57,4771.54 ; 2400.57,4838.54 2404.57,4838.54 ; 2401.57,2879.78 2437.57,2879.78 ; 2401.57,2880.78 2437.57,2880.78 ; 2401.57,2949.78 2404.57,2949.78 ; 2401.57,4769.54 2437.57,4769.54 ; 2401.57,4770.54 2437.57,4770.54 ; 2401.57,4839.54 2404.57,4839.54 ; 2402.57,2950.78 2404.57,2950.78 ; 2402.57,4840.54 2404.57,4840.54 ; 2403.57,2951.78 2405.57,2951.78 ; 2403.57,4841.54 2405.57,4841.54 ; 2404.57,2952.78 2405.57,2952.78 ; 2404.57,4842.54 2405.57,4842.54 ; 2420.57,2861.78 2455.57,2861.78 ; 2420.57,2898.78 2455.57,2898.78 ; 2420.57,4751.54 2455.57,4751.54 ; 2420.57,4788.54 2455.57,4788.54 ; 2421.57,2860.78 2456.57,2860.78 ; 2421.57,2899.78 2456.57,2899.78 ; 2421.57,4750.54 2456.57,4750.54 ; 2421.57,4789.54 2456.57,4789.54 ; 2422.57,2859.78 2457.57,2859.78 ; 2422.57,2900.78 2457.57,2900.78 ; 2422.57,4749.54 2457.57,4749.54 ; 2422.57,4790.54 2457.57,4790.54 ; 2423.57,2858.78 2458.57,2858.78 ; 2423.57,2901.78 2458.57,2901.78 ; 2423.57,4748.54 2458.57,4748.54 ; 2423.57,4791.54 2458.57,4791.54 ; 2424.57,2857.78 2459.57,2857.78 ; 2424.57,2902.78 2459.57,2902.78 ; 2424.57,4747.54 2459.57,4747.54 ; 2424.57,4792.54 2459.57,4792.54 ; 2425.57,2856.78 2460.57,2856.78 ; 2425.57,2903.78 2460.57,2903.78 ; 2425.57,4746.54 2460.57,4746.54 ; 2425.57,4793.54 2460.57,4793.54 ; 2426.57,2855.78 2461.57,2855.78 ; 2426.57,2904.78 2461.57,2904.78 ; 2426.57,4745.54 2461.57,4745.54 ; 2426.57,4794.54 2461.57,4794.54 ; 2427.57,2854.78 2462.57,2854.78 ; 2427.57,2905.78 2462.57,2905.78 ; 2427.57,4744.54 2462.57,4744.54 ; 2427.57,4795.54 2462.57,4795.54 ; 2428.57,2853.78 2463.57,2853.78 ; 2428.57,2906.78 2463.57,2906.78 ; 2428.57,4743.54 2463.57,4743.54 ; 2428.57,4796.54 2463.57,4796.54 ; 2429.57,2852.78 2464.57,2852.78 ; 2429.57,2907.78 2479.57,2907.78 ; 2429.57,4742.54 2464.57,4742.54 ; 2429.57,4797.54 2479.57,4797.54 ; 2430.57,2851.78 2465.57,2851.78 ; 2430.57,2908.78 2478.57,2908.78 ; 2430.57,4741.54 2465.57,4741.54 ; 2430.57,4798.54 2478.57,4798.54 ; 2431.57,2850.78 2466.57,2850.78 ; 2431.57,2909.78 2477.57,2909.78 ; 2431.57,4740.54 2466.57,4740.54 ; 2431.57,4799.54 2477.57,4799.54 ; 2432.57,2849.78 2467.57,2849.78 ; 2432.57,2910.78 2476.57,2910.78 ; 2432.57,4739.54 2467.57,4739.54 ; 2432.57,4800.54 2476.57,4800.54 ; 2433.57,2848.78 2468.57,2848.78 ; 2433.57,2911.78 2475.57,2911.78 ; 2433.57,2950.78 2436.57,2950.78 ; 2433.57,2951.78 2435.57,2951.78 ; 2433.57,2952.78 2434.57,2952.78 ; 2433.57,4738.54 2468.57,4738.54 ; 2433.57,4801.54 2475.57,4801.54 ; 2433.57,4840.54 2436.57,4840.54 ; 2433.57,4841.54 2435.57,4841.54 ; 2433.57,4842.54 2434.57,4842.54 ; 2434.57,2847.78 2469.57,2847.78 ; 2434.57,2912.78 2474.57,2912.78 ; 2434.57,2948.78 2438.57,2948.78 ; 2434.57,2949.78 2437.57,2949.78 ; 2434.57,4737.54 2469.57,4737.54 ; 2434.57,4802.54 2474.57,4802.54 ; 2434.57,4838.54 2438.57,4838.54 ; 2434.57,4839.54 2437.57,4839.54 ; 2435.57,2846.78 2470.57,2846.78 ; 2435.57,2913.78 2473.57,2913.78 ; 2435.57,2945.78 2441.57,2945.78 ; 2435.57,2946.78 2440.57,2946.78 ; 2435.57,2947.78 2439.57,2947.78 ; 2435.57,4736.54 2470.57,4736.54 ; 2435.57,4803.54 2473.57,4803.54 ; 2435.57,4835.54 2441.57,4835.54 ; 2435.57,4836.54 2440.57,4836.54 ; 2435.57,4837.54 2439.57,4837.54 ; 2436.57,2845.78 2471.57,2845.78 ; 2436.57,2914.78 2472.57,2914.78 ; 2436.57,2942.78 2444.57,2942.78 ; 2436.57,2943.78 2443.57,2943.78 ; 2436.57,2944.78 2442.57,2944.78 ; 2436.57,4735.54 2471.57,4735.54 ; 2436.57,4804.54 2472.57,4804.54 ; 2436.57,4832.54 2444.57,4832.54 ; 2436.57,4833.54 2443.57,4833.54 ; 2436.57,4834.54 2442.57,4834.54 ; 2437.57,2844.78 2472.57,2844.78 ; 2437.57,2915.78 2471.57,2915.78 ; 2437.57,2939.78 2447.57,2939.78 ; 2437.57,2940.78 2446.57,2940.78 ; 2437.57,2941.78 2445.57,2941.78 ; 2437.57,4734.54 2472.57,4734.54 ; 2437.57,4805.54 2471.57,4805.54 ; 2437.57,4829.54 2447.57,4829.54 ; 2437.57,4830.54 2446.57,4830.54 ; 2437.57,4831.54 2445.57,4831.54 ; 2438.57,2843.78 2473.57,2843.78 ; 2438.57,2916.78 2470.57,2916.78 ; 2438.57,2936.78 2450.57,2936.78 ; 2438.57,2937.78 2449.57,2937.78 ; 2438.57,2938.78 2448.57,2938.78 ; 2438.57,4733.54 2473.57,4733.54 ; 2438.57,4806.54 2470.57,4806.54 ; 2438.57,4826.54 2450.57,4826.54 ; 2438.57,4827.54 2449.57,4827.54 ; 2438.57,4828.54 2448.57,4828.54 ; 2439.57,2842.78 2474.57,2842.78 ; 2439.57,2917.78 2469.57,2917.78 ; 2439.57,2933.78 2453.57,2933.78 ; 2439.57,2934.78 2452.57,2934.78 ; 2439.57,2935.78 2451.57,2935.78 ; 2439.57,4732.54 2474.57,4732.54 ; 2439.57,4807.54 2469.57,4807.54 ; 2439.57,4823.54 2453.57,4823.54 ; 2439.57,4824.54 2452.57,4824.54 ; 2439.57,4825.54 2451.57,4825.54 ; 2440.57,2841.78 2475.57,2841.78 ; 2440.57,2918.78 2468.57,2918.78 ; 2440.57,2930.78 2456.57,2930.78 ; 2440.57,2931.78 2455.57,2931.78 ; 2440.57,2932.78 2454.57,2932.78 ; 2440.57,4731.54 2475.57,4731.54 ; 2440.57,4808.54 2468.57,4808.54 ; 2440.57,4820.54 2456.57,4820.54 ; 2440.57,4821.54 2455.57,4821.54 ; 2440.57,4822.54 2454.57,4822.54 ; 2441.57,2840.78 2476.57,2840.78 ; 2441.57,2919.78 2468.57,2919.78 ; 2441.57,2929.78 2457.57,2929.78 ; 2441.57,4730.54 2476.57,4730.54 ; 2441.57,4809.54 2468.57,4809.54 ; 2441.57,4819.54 2457.57,4819.54 ; 2442.57,2839.78 2477.57,2839.78 ; 2442.57,2920.78 2469.57,2920.78 ; 2442.57,2928.78 2477.57,2928.78 ; 2442.57,4729.54 2477.57,4729.54 ; 2442.57,4810.54 2469.57,4810.54 ; 2442.57,4818.54 2477.57,4818.54 ; 2443.57,2838.78 2478.57,2838.78 ; 2443.57,2921.78 2470.57,2921.78 ; 2443.57,2927.78 2476.57,2927.78 ; 2443.57,4728.54 2478.57,4728.54 ; 2443.57,4811.54 2470.57,4811.54 ; 2443.57,4817.54 2476.57,4817.54 ; 2444.57,2837.78 2479.57,2837.78 ; 2444.57,2922.78 2471.57,2922.78 ; 2444.57,2926.78 2475.57,2926.78 ; 2444.57,4727.54 2479.57,4727.54 ; 2444.57,4812.54 2471.57,4812.54 ; 2444.57,4816.54 2475.57,4816.54 ; 2445.57,2836.78 2480.57,2836.78 ; 2445.57,2923.78 2472.57,2923.78 ; 2445.57,2925.78 2474.57,2925.78 ; 2445.57,4726.54 2480.57,4726.54 ; 2445.57,4813.54 2472.57,4813.54 ; 2445.57,4815.54 2474.57,4815.54 ; 2446.57,2835.78 2481.57,2835.78 ; 2446.57,2924.78 2473.57,2924.78 ; 2446.57,4725.54 2481.57,4725.54 ; 2446.57,4814.54 2473.57,4814.54 ; 2447.57,2834.78 2482.57,2834.78 ; 2447.57,4724.54 2482.57,4724.54 ; 2448.57,2833.78 2483.57,2833.78 ; 2448.57,4723.54 2483.57,4723.54 ; 2449.57,2832.78 2484.57,2832.78 ; 2449.57,4722.54 2484.57,4722.54 ; 2450.57,2831.78 2485.57,2831.78 ; 2450.57,4721.54 2485.57,4721.54 ; 2451.57,2830.78 2486.57,2830.78 ; 2451.57,4720.54 2486.57,4720.54 ; 2452.57,2829.78 2487.57,2829.78 ; 2452.57,4719.54 2487.57,4719.54 ; 2453.57,2828.78 2488.57,2828.78 ; 2453.57,4718.54 2488.57,4718.54 ; 2454.57,2827.78 2489.57,2827.78 ; 2454.57,4717.54 2489.57,4717.54 ; 2455.57,2826.78 2490.57,2826.78 ; 2455.57,4716.54 2490.57,4716.54 ; 2456.57,2825.78 2491.57,2825.78 ; 2456.57,4715.54 2491.57,4715.54 ; 2457.57,2824.78 2492.57,2824.78 ; 2457.57,4714.54 2492.57,4714.54 ; 2458.57,2823.78 2493.57,2823.78 ; 2458.57,4713.54 2493.57,4713.54 ; 2459.57,2822.78 2494.57,2822.78 ; 2459.57,2929.78 2478.57,2929.78 ; 2459.57,4712.54 2494.57,4712.54 ; 2459.57,4819.54 2478.57,4819.54 ; 2460.57,2821.78 2495.57,2821.78 ; 2460.57,2930.78 2479.57,2930.78 ; 2460.57,4711.54 2495.57,4711.54 ; 2460.57,4820.54 2479.57,4820.54 ; 2461.57,2820.78 2496.57,2820.78 ; 2461.57,2931.78 2480.57,2931.78 ; 2461.57,4710.54 2496.57,4710.54 ; 2461.57,4821.54 2480.57,4821.54 ; 2462.57,2819.78 2496.57,2819.78 ; 2462.57,2932.78 2481.57,2932.78 ; 2462.57,4709.54 2496.57,4709.54 ; 2462.57,4822.54 2481.57,4822.54 ; 2463.57,2818.78 2496.57,2818.78 ; 2463.57,2933.78 2482.57,2933.78 ; 2463.57,4708.54 2496.57,4708.54 ; 2463.57,4823.54 2482.57,4823.54 ; 2464.57,2817.78 2496.57,2817.78 ; 2464.57,2906.78 2480.57,2906.78 ; 2464.57,2934.78 2483.57,2934.78 ; 2464.57,4707.54 2496.57,4707.54 ; 2464.57,4796.54 2480.57,4796.54 ; 2464.57,4824.54 2483.57,4824.54 ; 2465.57,2816.78 2496.57,2816.78 ; 2465.57,2905.78 2481.57,2905.78 ; 2465.57,2935.78 2484.57,2935.78 ; 2465.57,4706.54 2496.57,4706.54 ; 2465.57,4795.54 2481.57,4795.54 ; 2465.57,4825.54 2484.57,4825.54 ; 2466.57,2815.78 2497.57,2815.78 ; 2466.57,2904.78 2482.57,2904.78 ; 2466.57,2936.78 2485.57,2936.78 ; 2466.57,4705.54 2497.57,4705.54 ; 2466.57,4794.54 2482.57,4794.54 ; 2466.57,4826.54 2485.57,4826.54 ; 2467.57,2814.78 2497.57,2814.78 ; 2467.57,2903.78 2483.57,2903.78 ; 2467.57,2937.78 2486.57,2937.78 ; 2467.57,4704.54 2497.57,4704.54 ; 2467.57,4793.54 2483.57,4793.54 ; 2467.57,4827.54 2486.57,4827.54 ; 2468.57,2813.78 2497.57,2813.78 ; 2468.57,2902.78 2484.57,2902.78 ; 2468.57,2938.78 2487.57,2938.78 ; 2468.57,4703.54 2497.57,4703.54 ; 2468.57,4792.54 2484.57,4792.54 ; 2468.57,4828.54 2487.57,4828.54 ; 2469.57,2812.78 2497.57,2812.78 ; 2469.57,2939.78 2488.57,2939.78 ; 2469.57,4702.54 2497.57,4702.54 ; 2469.57,4829.54 2488.57,4829.54 ; 2470.57,2811.78 2497.57,2811.78 ; 2470.57,2901.78 2485.57,2901.78 ; 2470.57,2940.78 2489.57,2940.78 ; 2470.57,4701.54 2497.57,4701.54 ; 2470.57,4791.54 2485.57,4791.54 ; 2470.57,4830.54 2489.57,4830.54 ; 2471.57,2810.78 2497.57,2810.78 ; 2471.57,2941.78 2490.57,2941.78 ; 2471.57,4700.54 2497.57,4700.54 ; 2471.57,4831.54 2490.57,4831.54 ; 2472.57,2809.78 2498.57,2809.78 ; 2472.57,2900.78 2486.57,2900.78 ; 2472.57,2942.78 2491.57,2942.78 ; 2472.57,4699.54 2498.57,4699.54 ; 2472.57,4790.54 2486.57,4790.54 ; 2472.57,4832.54 2491.57,4832.54 ; 2473.57,2808.78 2498.57,2808.78 ; 2473.57,2943.78 2495.57,2943.78 ; 2473.57,4698.54 2498.57,4698.54 ; 2473.57,4833.54 2495.57,4833.54 ; 2474.57,2807.78 2498.57,2807.78 ; 2474.57,2944.78 2497.57,2944.78 ; 2474.57,4697.54 2498.57,4697.54 ; 2474.57,4834.54 2497.57,4834.54 ; 2475.57,2806.78 2498.57,2806.78 ; 2475.57,2899.78 2487.57,2899.78 ; 2475.57,2945.78 2498.57,2945.78 ; 2475.57,4696.54 2498.57,4696.54 ; 2475.57,4789.54 2487.57,4789.54 ; 2475.57,4835.54 2498.57,4835.54 ; 2476.57,2805.78 2498.57,2805.78 ; 2476.57,2946.78 2499.57,2946.78 ; 2476.57,4695.54 2498.57,4695.54 ; 2476.57,4836.54 2499.57,4836.54 ; 2477.57,2804.78 2498.57,2804.78 ; 2477.57,2947.78 2500.57,2947.78 ; 2477.57,4694.54 2498.57,4694.54 ; 2477.57,4837.54 2500.57,4837.54 ; 2478.57,2803.78 2499.57,2803.78 ; 2478.57,2898.78 2488.57,2898.78 ; 2478.57,2948.78 2501.57,2948.78 ; 2478.57,4693.54 2499.57,4693.54 ; 2478.57,4788.54 2488.57,4788.54 ; 2478.57,4838.54 2501.57,4838.54 ; 2479.57,2949.78 2501.57,2949.78 ; 2479.57,4839.54 2501.57,4839.54 ; 2480.57,2950.78 2502.57,2950.78 ; 2480.57,4840.54 2502.57,4840.54 ; 2481.57,2897.78 2489.57,2897.78 ; 2481.57,2951.78 2502.57,2951.78 ; 2481.57,4787.54 2489.57,4787.54 ; 2481.57,4841.54 2502.57,4841.54 ; 2482.57,2952.78 2502.57,2952.78 ; 2482.57,2953.78 2502.57,2953.78 ; 2482.57,2954.78 2502.57,2954.78 ; 2482.57,2955.78 2502.57,2955.78 ; 2482.57,2956.78 2501.57,2956.78 ; 2482.57,4842.54 2502.57,4842.54 ; 2482.57,4843.54 2502.57,4843.54 ; 2482.57,4844.54 2502.57,4844.54 ; 2482.57,4845.54 2502.57,4845.54 ; 2482.57,4846.54 2501.57,4846.54 ; 2483.57,2802.78 2499.57,2802.78 ; 2483.57,2957.78 2501.57,2957.78 ; 2483.57,2958.78 2500.57,2958.78 ; 2483.57,4692.54 2499.57,4692.54 ; 2483.57,4847.54 2501.57,4847.54 ; 2483.57,4848.54 2500.57,4848.54 ; 2484.57,2896.78 2490.57,2896.78 ; 2484.57,2959.78 2500.57,2959.78 ; 2484.57,4786.54 2490.57,4786.54 ; 2484.57,4849.54 2500.57,4849.54 ; 2485.57,2960.78 2499.57,2960.78 ; 2485.57,4850.54 2499.57,4850.54 ; 2486.57,2961.78 2497.57,2961.78 ; 2486.57,4851.54 2497.57,4851.54 ; 2487.57,2895.78 2491.57,2895.78 ; 2487.57,4785.54 2491.57,4785.54 ; 2488.57,2962.78 2495.57,2962.78 ; 2488.57,4852.54 2495.57,4852.54 ; 2489.57,2801.78 2499.57,2801.78 ; 2489.57,4691.54 2499.57,4691.54 ; 2490.57,2894.78 2491.57,2894.78 ; 2490.57,4784.54 2491.57,4784.54 ; 2491.57,2783.78 2500.57,2783.78 ; 2491.57,4673.54 2500.57,4673.54 ; 2492.57,2976.78 2501.57,2976.78 ; 2492.57,4866.54 2501.57,4866.54 ; 2495.57,2784.78 2502.57,2784.78 ; 2495.57,2800.78 2499.57,2800.78 ; 2495.57,2975.78 2502.57,2975.78 ; 2495.57,4674.54 2502.57,4674.54 ; 2495.57,4690.54 2499.57,4690.54 ; 2495.57,4865.54 2502.57,4865.54 ; 2497.57,2785.78 2504.57,2785.78 ; 2497.57,4675.54 2504.57,4675.54 ; 2498.57,2974.78 2504.57,2974.78 ; 2498.57,4864.54 2504.57,4864.54 ; 2499.57,2786.78 2505.57,2786.78 ; 2499.57,4676.54 2505.57,4676.54 ; 2500.57,2973.78 2505.57,2973.78 ; 2500.57,4863.54 2505.57,4863.54 ; 2501.57,2787.78 2506.57,2787.78 ; 2501.57,2972.78 2507.57,2972.78 ; 2501.57,4677.54 2506.57,4677.54 ; 2501.57,4862.54 2507.57,4862.54 ; 2503.57,2788.78 2507.57,2788.78 ; 2503.57,2971.78 2508.57,2971.78 ; 2503.57,4678.54 2507.57,4678.54 ; 2503.57,4861.54 2508.57,4861.54 ; 2504.57,2789.78 2509.57,2789.78 ; 2504.57,2970.78 2509.57,2970.78 ; 2504.57,4679.54 2509.57,4679.54 ; 2504.57,4860.54 2509.57,4860.54 ; 2505.57,2790.78 2510.57,2790.78 ; 2505.57,2969.78 2510.57,2969.78 ; 2505.57,4680.54 2510.57,4680.54 ; 2505.57,4859.54 2510.57,4859.54 ; 2506.57,2791.78 2510.57,2791.78 ; 2506.57,4681.54 2510.57,4681.54 ; 2507.57,2792.78 2511.57,2792.78 ; 2507.57,2968.78 2511.57,2968.78 ; 2507.57,4682.54 2511.57,4682.54 ; 2507.57,4858.54 2511.57,4858.54 ; 2508.57,2793.78 2512.57,2793.78 ; 2508.57,2966.78 2512.57,2966.78 ; 2508.57,2967.78 2512.57,2967.78 ; 2508.57,4683.54 2512.57,4683.54 ; 2508.57,4856.54 2512.57,4856.54 ; 2508.57,4857.54 2512.57,4857.54 ; 2509.57,2794.78 2513.57,2794.78 ; 2509.57,2965.78 2513.57,2965.78 ; 2509.57,4684.54 2513.57,4684.54 ; 2509.57,4855.54 2513.57,4855.54 ; 2510.57,2795.78 2514.57,2795.78 ; 2510.57,2964.78 2514.57,2964.78 ; 2510.57,4685.54 2514.57,4685.54 ; 2510.57,4854.54 2514.57,4854.54 ; 2511.57,2796.78 2514.57,2796.78 ; 2511.57,2797.78 2515.57,2797.78 ; 2511.57,2962.78 2515.57,2962.78 ; 2511.57,2963.78 2514.57,2963.78 ; 2511.57,4686.54 2514.57,4686.54 ; 2511.57,4687.54 2515.57,4687.54 ; 2511.57,4852.54 2515.57,4852.54 ; 2511.57,4853.54 2514.57,4853.54 ; 2512.57,2798.78 2515.57,2798.78 ; 2512.57,2799.78 2516.57,2799.78 ; 2512.57,2961.78 2515.57,2961.78 ; 2512.57,4688.54 2515.57,4688.54 ; 2512.57,4689.54 2516.57,4689.54 ; 2512.57,4851.54 2515.57,4851.54 ; 2513.57,2800.78 2516.57,2800.78 ; 2513.57,2801.78 2517.57,2801.78 ; 2513.57,2958.78 2517.57,2958.78 ; 2513.57,2959.78 2516.57,2959.78 ; 2513.57,2960.78 2516.57,2960.78 ; 2513.57,4690.54 2516.57,4690.54 ; 2513.57,4691.54 2517.57,4691.54 ; 2513.57,4848.54 2517.57,4848.54 ; 2513.57,4849.54 2516.57,4849.54 ; 2513.57,4850.54 2516.57,4850.54 ; 2514.57,2802.78 2517.57,2802.78 ; 2514.57,2803.78 2517.57,2803.78 ; 2514.57,2956.78 2517.57,2956.78 ; 2514.57,2957.78 2517.57,2957.78 ; 2514.57,4692.54 2517.57,4692.54 ; 2514.57,4693.54 2517.57,4693.54 ; 2514.57,4846.54 2517.57,4846.54 ; 2514.57,4847.54 2517.57,4847.54 ; 2515.57,2804.78 2518.57,2804.78 ; 2515.57,2805.78 2518.57,2805.78 ; 2515.57,2806.78 2518.57,2806.78 ; 2515.57,2807.78 2518.57,2807.78 ; 2515.57,2952.78 2519.57,2952.78 ; 2515.57,2953.78 2518.57,2953.78 ; 2515.57,2954.78 2518.57,2954.78 ; 2515.57,2955.78 2518.57,2955.78 ; 2515.57,4694.54 2518.57,4694.54 ; 2515.57,4695.54 2518.57,4695.54 ; 2515.57,4696.54 2518.57,4696.54 ; 2515.57,4697.54 2518.57,4697.54 ; 2515.57,4842.54 2519.57,4842.54 ; 2515.57,4843.54 2518.57,4843.54 ; 2515.57,4844.54 2518.57,4844.54 ; 2515.57,4845.54 2518.57,4845.54 ; 2516.57,2808.78 2519.57,2808.78 ; 2516.57,2809.78 2519.57,2809.78 ; 2516.57,2810.78 2519.57,2810.78 ; 2516.57,2811.78 2519.57,2811.78 ; 2516.57,2812.78 2519.57,2812.78 ; 2516.57,2813.78 2519.57,2813.78 ; 2516.57,2814.78 2519.57,2814.78 ; 2516.57,2815.78 2519.57,2815.78 ; 2516.57,2816.78 2519.57,2816.78 ; 2516.57,2817.78 2519.57,2817.78 ; 2516.57,2818.78 2519.57,2818.78 ; 2516.57,2819.78 2519.57,2819.78 ; 2516.57,2820.78 2519.57,2820.78 ; 2516.57,2821.78 2519.57,2821.78 ; 2516.57,2822.78 2519.57,2822.78 ; 2516.57,2823.78 2519.57,2823.78 ; 2516.57,2824.78 2519.57,2824.78 ; 2516.57,2825.78 2519.57,2825.78 ; 2516.57,2826.78 2519.57,2826.78 ; 2516.57,2827.78 2519.57,2827.78 ; 2516.57,2828.78 2519.57,2828.78 ; 2516.57,2829.78 2519.57,2829.78 ; 2516.57,2830.78 2519.57,2830.78 ; 2516.57,2831.78 2519.57,2831.78 ; 2516.57,2832.78 2519.57,2832.78 ; 2516.57,2833.78 2519.57,2833.78 ; 2516.57,2834.78 2519.57,2834.78 ; 2516.57,2835.78 2519.57,2835.78 ; 2516.57,2836.78 2519.57,2836.78 ; 2516.57,2837.78 2519.57,2837.78 ; 2516.57,2838.78 2519.57,2838.78 ; 2516.57,2839.78 2519.57,2839.78 ; 2516.57,2840.78 2519.57,2840.78 ; 2516.57,2841.78 2519.57,2841.78 ; 2516.57,2842.78 2519.57,2842.78 ; 2516.57,2843.78 2519.57,2843.78 ; 2516.57,2844.78 2519.57,2844.78 ; 2516.57,2845.78 2519.57,2845.78 ; 2516.57,2846.78 2519.57,2846.78 ; 2516.57,2847.78 2519.57,2847.78 ; 2516.57,2848.78 2519.57,2848.78 ; 2516.57,2849.78 2519.57,2849.78 ; 2516.57,2850.78 2519.57,2850.78 ; 2516.57,2851.78 2519.57,2851.78 ; 2516.57,2852.78 2519.57,2852.78 ; 2516.57,2853.78 2519.57,2853.78 ; 2516.57,2854.78 2519.57,2854.78 ; 2516.57,2855.78 2519.57,2855.78 ; 2516.57,2856.78 2519.57,2856.78 ; 2516.57,2857.78 2519.57,2857.78 ; 2516.57,2858.78 2519.57,2858.78 ; 2516.57,2859.78 2519.57,2859.78 ; 2516.57,2860.78 2519.57,2860.78 ; 2516.57,2861.78 2519.57,2861.78 ; 2516.57,2862.78 2519.57,2862.78 ; 2516.57,2863.78 2519.57,2863.78 ; 2516.57,2864.78 2519.57,2864.78 ; 2516.57,2865.78 2519.57,2865.78 ; 2516.57,2866.78 2519.57,2866.78 ; 2516.57,2867.78 2519.57,2867.78 ; 2516.57,2868.78 2519.57,2868.78 ; 2516.57,2869.78 2519.57,2869.78 ; 2516.57,2870.78 2519.57,2870.78 ; 2516.57,2871.78 2519.57,2871.78 ; 2516.57,2872.78 2519.57,2872.78 ; 2516.57,2873.78 2519.57,2873.78 ; 2516.57,2874.78 2519.57,2874.78 ; 2516.57,2875.78 2519.57,2875.78 ; 2516.57,2876.78 2519.57,2876.78 ; 2516.57,2877.78 2519.57,2877.78 ; 2516.57,2878.78 2519.57,2878.78 ; 2516.57,2879.78 2519.57,2879.78 ; 2516.57,2880.78 2519.57,2880.78 ; 2516.57,2881.78 2519.57,2881.78 ; 2516.57,2882.78 2519.57,2882.78 ; 2516.57,2883.78 2519.57,2883.78 ; 2516.57,2884.78 2519.57,2884.78 ; 2516.57,2885.78 2519.57,2885.78 ; 2516.57,2886.78 2519.57,2886.78 ; 2516.57,2887.78 2519.57,2887.78 ; 2516.57,2888.78 2519.57,2888.78 ; 2516.57,2889.78 2519.57,2889.78 ; 2516.57,2890.78 2519.57,2890.78 ; 2516.57,2891.78 2519.57,2891.78 ; 2516.57,2892.78 2519.57,2892.78 ; 2516.57,2893.78 2519.57,2893.78 ; 2516.57,2894.78 2519.57,2894.78 ; 2516.57,2895.78 2519.57,2895.78 ; 2516.57,2896.78 2519.57,2896.78 ; 2516.57,2897.78 2519.57,2897.78 ; 2516.57,2898.78 2519.57,2898.78 ; 2516.57,2899.78 2519.57,2899.78 ; 2516.57,2900.78 2519.57,2900.78 ; 2516.57,2901.78 2519.57,2901.78 ; 2516.57,2902.78 2519.57,2902.78 ; 2516.57,2903.78 2519.57,2903.78 ; 2516.57,2904.78 2519.57,2904.78 ; 2516.57,2905.78 2519.57,2905.78 ; 2516.57,2906.78 2519.57,2906.78 ; 2516.57,2907.78 2519.57,2907.78 ; 2516.57,2908.78 2519.57,2908.78 ; 2516.57,2909.78 2519.57,2909.78 ; 2516.57,2910.78 2519.57,2910.78 ; 2516.57,2911.78 2519.57,2911.78 ; 2516.57,2912.78 2519.57,2912.78 ; 2516.57,2913.78 2519.57,2913.78 ; 2516.57,2914.78 2519.57,2914.78 ; 2516.57,2915.78 2519.57,2915.78 ; 2516.57,2916.78 2519.57,2916.78 ; 2516.57,2917.78 2519.57,2917.78 ; 2516.57,2918.78 2519.57,2918.78 ; 2516.57,2919.78 2519.57,2919.78 ; 2516.57,2920.78 2519.57,2920.78 ; 2516.57,2921.78 2519.57,2921.78 ; 2516.57,2922.78 2519.57,2922.78 ; 2516.57,2923.78 2519.57,2923.78 ; 2516.57,2924.78 2519.57,2924.78 ; 2516.57,2925.78 2519.57,2925.78 ; 2516.57,2926.78 2519.57,2926.78 ; 2516.57,2927.78 2519.57,2927.78 ; 2516.57,2928.78 2519.57,2928.78 ; 2516.57,2929.78 2519.57,2929.78 ; 2516.57,2930.78 2519.57,2930.78 ; 2516.57,2931.78 2519.57,2931.78 ; 2516.57,2932.78 2519.57,2932.78 ; 2516.57,2933.78 2519.57,2933.78 ; 2516.57,2934.78 2519.57,2934.78 ; 2516.57,2935.78 2519.57,2935.78 ; 2516.57,2936.78 2519.57,2936.78 ; 2516.57,2937.78 2519.57,2937.78 ; 2516.57,2938.78 2519.57,2938.78 ; 2516.57,2939.78 2519.57,2939.78 ; 2516.57,2940.78 2519.57,2940.78 ; 2516.57,2941.78 2519.57,2941.78 ; 2516.57,2942.78 2519.57,2942.78 ; 2516.57,2943.78 2519.57,2943.78 ; 2516.57,2944.78 2519.57,2944.78 ; 2516.57,2945.78 2519.57,2945.78 ; 2516.57,2946.78 2519.57,2946.78 ; 2516.57,2947.78 2519.57,2947.78 ; 2516.57,2948.78 2519.57,2948.78 ; 2516.57,2949.78 2519.57,2949.78 ; 2516.57,2950.78 2519.57,2950.78 ; 2516.57,2951.78 2519.57,2951.78 ; 2516.57,4698.54 2519.57,4698.54 ; 2516.57,4699.54 2519.57,4699.54 ; 2516.57,4700.54 2519.57,4700.54 ; 2516.57,4701.54 2519.57,4701.54 ; 2516.57,4702.54 2519.57,4702.54 ; 2516.57,4703.54 2519.57,4703.54 ; 2516.57,4704.54 2519.57,4704.54 ; 2516.57,4705.54 2519.57,4705.54 ; 2516.57,4706.54 2519.57,4706.54 ; 2516.57,4707.54 2519.57,4707.54 ; 2516.57,4708.54 2519.57,4708.54 ; 2516.57,4709.54 2519.57,4709.54 ; 2516.57,4710.54 2519.57,4710.54 ; 2516.57,4711.54 2519.57,4711.54 ; 2516.57,4712.54 2519.57,4712.54 ; 2516.57,4713.54 2519.57,4713.54 ; 2516.57,4714.54 2519.57,4714.54 ; 2516.57,4715.54 2519.57,4715.54 ; 2516.57,4716.54 2519.57,4716.54 ; 2516.57,4717.54 2519.57,4717.54 ; 2516.57,4718.54 2519.57,4718.54 ; 2516.57,4719.54 2519.57,4719.54 ; 2516.57,4720.54 2519.57,4720.54 ; 2516.57,4721.54 2519.57,4721.54 ; 2516.57,4722.54 2519.57,4722.54 ; 2516.57,4723.54 2519.57,4723.54 ; 2516.57,4724.54 2519.57,4724.54 ; 2516.57,4725.54 2519.57,4725.54 ; 2516.57,4726.54 2519.57,4726.54 ; 2516.57,4727.54 2519.57,4727.54 ; 2516.57,4728.54 2519.57,4728.54 ; 2516.57,4729.54 2519.57,4729.54 ; 2516.57,4730.54 2519.57,4730.54 ; 2516.57,4731.54 2519.57,4731.54 ; 2516.57,4732.54 2519.57,4732.54 ; 2516.57,4733.54 2519.57,4733.54 ; 2516.57,4734.54 2519.57,4734.54 ; 2516.57,4735.54 2519.57,4735.54 ; 2516.57,4736.54 2519.57,4736.54